# Altium PCB LiDAR.PcbDoc
Units mm, origin at the board's own origin, x right, y up, seen from the top; angles counter-clockwise.
Board outline 35 x 40 mm, 2 copper layers (Top Layer, Bottom Layer); 13 components, 9 nets, 36 pads, 9 vias.
Unrouted connection lines stored in the file: 41.
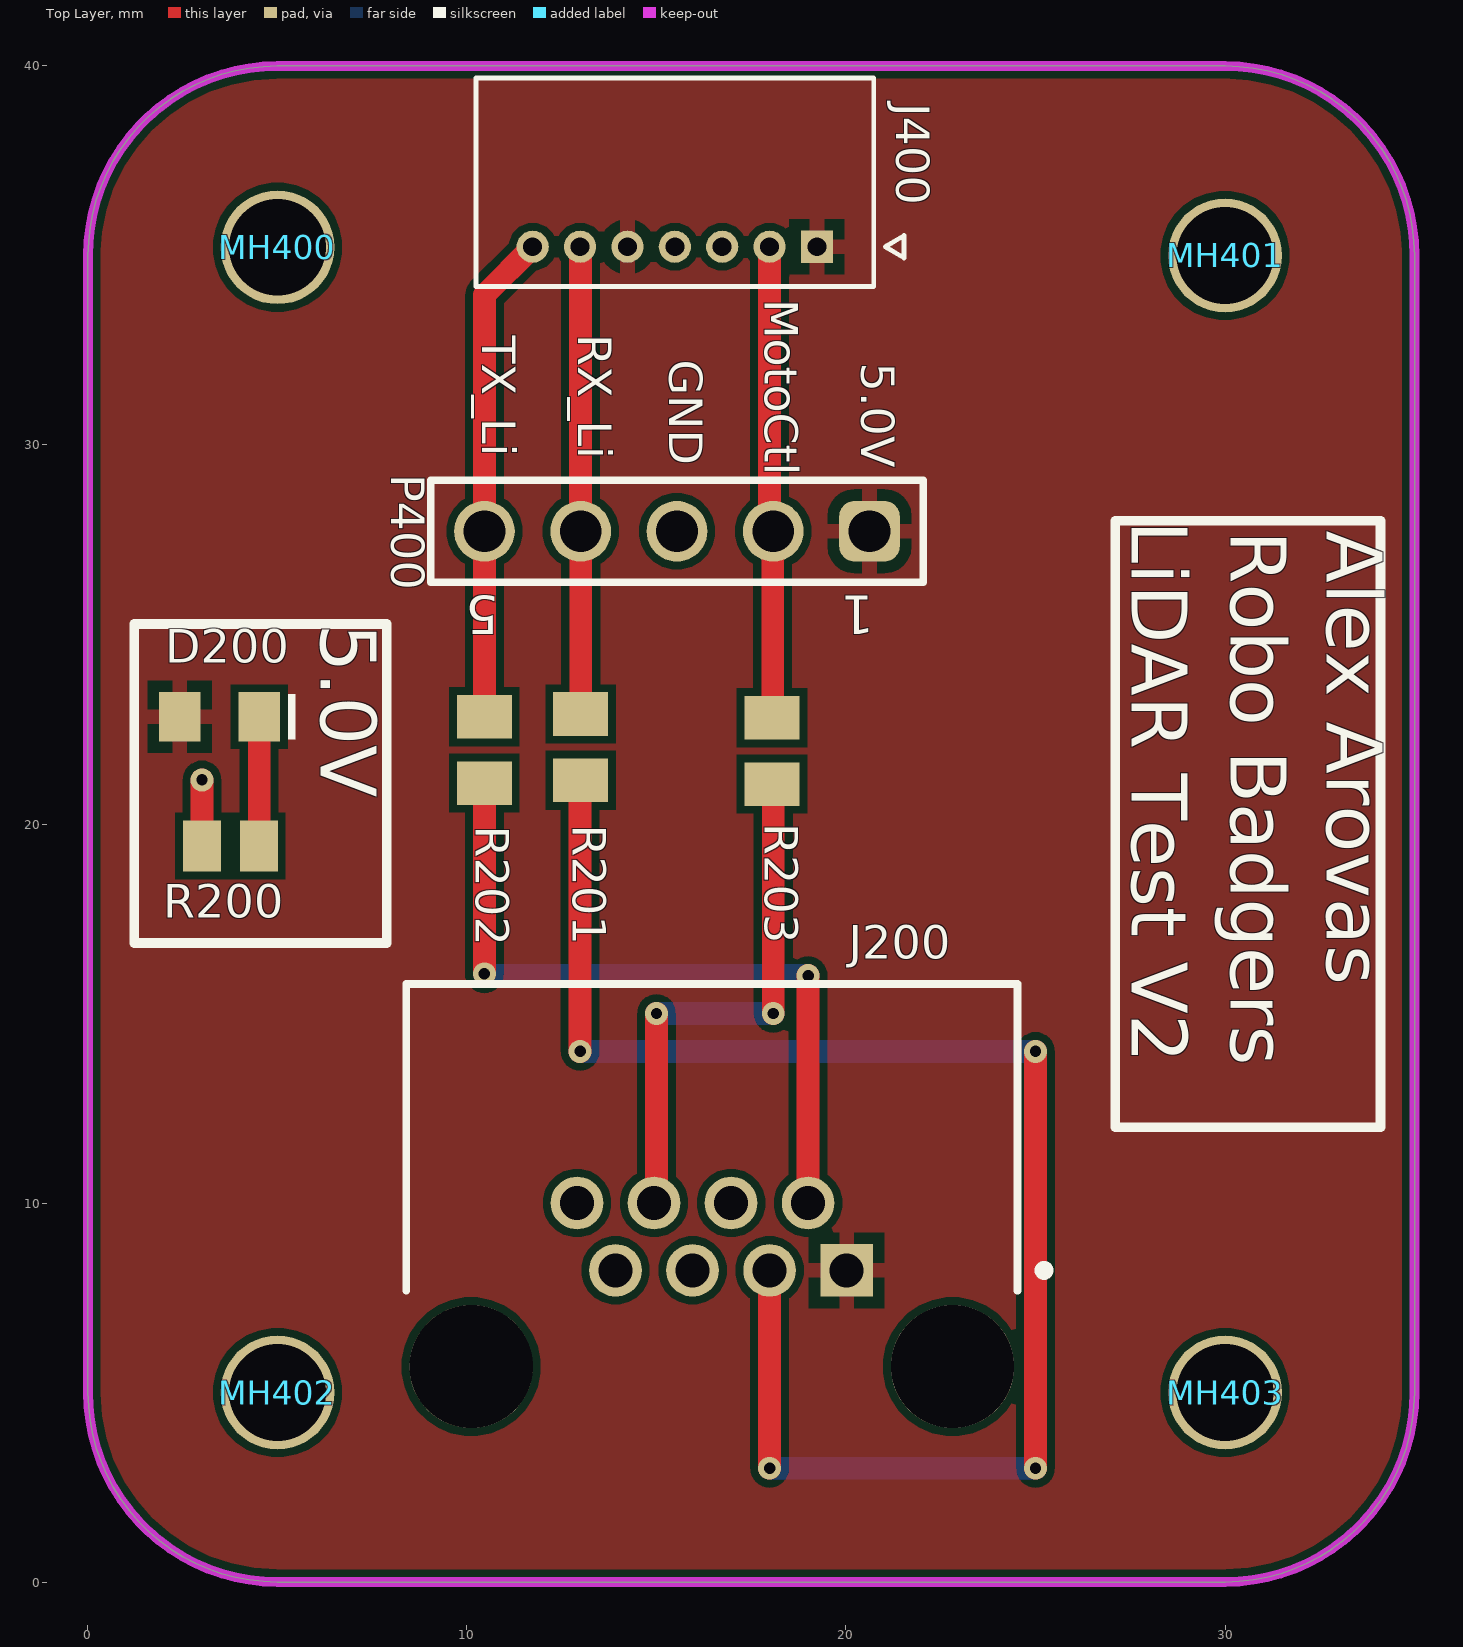
[diagram p0: Top Layer view]
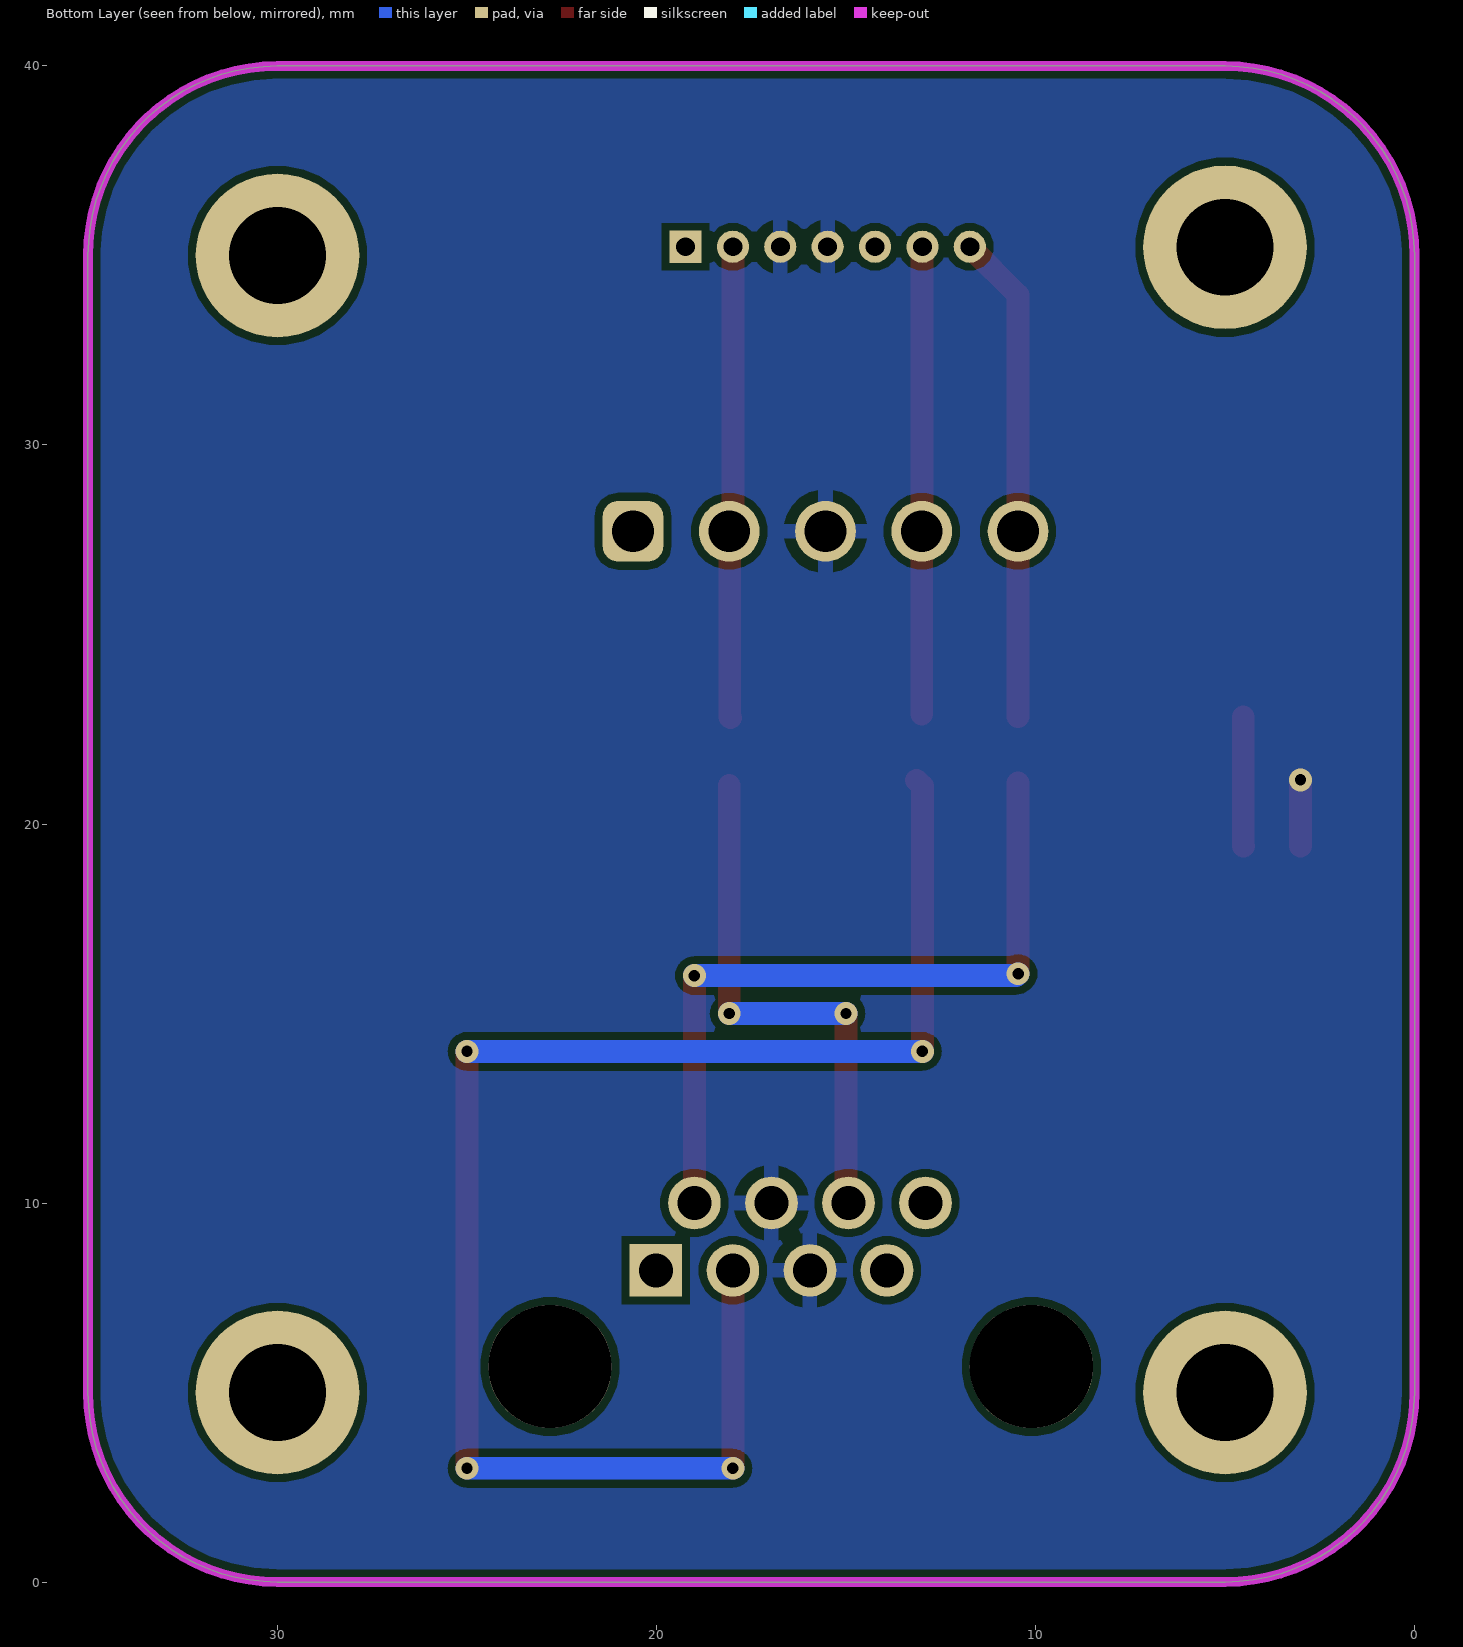
[diagram p1: Bottom Layer view, seen from below]

## Layer stack, top to bottom
Top Solder: solder mask 0.0102, Solder Resist, Dk 3.5
Top Layer: signal copper 0.0356
Dielectric1: dielectric 0.32, FR-4, Dk 4.8
Bottom Layer: signal copper 0.0356
Bottom Solder: solder mask 0.0102, Solder Resist, Dk 3.5

## Board outline
0,5 ccw(c5,5) 5,0 30,0 ccw(c30,5) 35,5 35,35 ccw(c30,35) 30,40 5,40 ccw(c5,35) 0,35

## Design rules (kind name [scope] priority, off if disabled: settings)
Clearance Polygon_Clearance [All vs InPolygon] p1: gap=0.2 ignorepadtopadclearanceinfootprint=FALSE
Clearance [All] p2: gap=0.2 ignorepadtopadclearanceinfootprint=TRUE
ComponentClearance [InComponent('U3')] p1: gap=0 collisioncheckmode=3 verticalgap=0.254 showdistances=FALSE
Height [All] p1: minheight=0 maxheight=75 prefheight=12.7
HoleSize [All] p1: absolutevalues=TRUE maxlimit=6.35 minlimit=0.3 maxpercent=80.000 minpercent=20.000
MinimumAnnularRing [All] p1: minimumring=0.15
MinimumSolderMaskSliver [All] p1: minsoldermaskwidth=0.22
NetAntennae NetAntennae_5.0V [InNet('5.0V')] p1: netantennaetolerance=0
NetAntennae NetAntennae_3.3V [InNet('3.3V')] p2: netantennaetolerance=0
PlaneClearance [All] p1: clearance=0.3
PlaneConnect [All] p1: planeconnectstyle=Relief reliefexpansion=0.3 reliefentries=4 reliefconductorwidth=0.3 reliefairgap=0.3
PolygonConnect ViaConnect [All vs IsVia] p1: connectstyle=Direct reliefconductorwidth=0.381 reliefentries=4 polygonreliefangle="90 Angle" airgapwidth=0.254
PolygonConnect [All] p2: connectstyle=Relief reliefconductorwidth=0.4 reliefentries=4 polygonreliefangle="90 Angle" airgapwidth=0.3
RoutingVias [All] p1: holewidth=0.3 width=0.6 viastyle="Through Hole" minholewidth=0.3 minwidth=0.6 maxholewidth=5 maxwidth=10
SilkToSilkClearance [All] p1: silktosilkclearance=0
SilkToSolderMaskClearance [IsPad] p1: minsilkscreentomaskgap=0 clearancetoexposedcopper=TRUE
SolderMaskExpansion [All] p1: expansion=0.102 istentingtop=FALSE
UnConnectedPin [All] p1:
Width [All] p1: maxlimit=10 minlimit=0.2 preferedwidth=0.6
21 further rules are at their usual default settings.

## Classes and differential pairs
component class 04_Mechanical: J400 MH400 MH401 MH402 MH403 P400 U1 U400

## Components (designator, comment, footprint, x,y, rotation, side; value= is the part's Value field where it differs from the comment)
D200 "150080GS75000" WL-SMCW_0805_150080xx75000 3.472,22.831 r180 top
J200 "RJHSE-5080" FP-RJHSE-5080-MFG 16.46,8.095 r0 top
J400 "53048-0710" MOLEX_530480710 19.234,35.231 r180 top
MH400 "MHOLE_2_55MM" MHOLE_2_55MM 5,35.215 r0 top
MH401 "MHOLE_2_55MM" MHOLE_2_55MM 30,35 r0 top
MH402 "MHOLE_2_55MM" MHOLE_2_55MM 5,5 r0 top locked
MH403 "MHOLE_2_55MM" MHOLE_2_55MM 30,5 r0 top
P400 "61300511121" 61300511121 15.54,27.723 r180 top
R200 "330R" RESC2013X60X40LL20T25 3.759,19.415 r180 top
R201 "0R" RESC2013X70X40NL20T20 13,22.028 r90 top
R202 "0R" RESC2013X70X40NL20T20 10.46,21.956 r90 top
R203 "0R" RESC2013X70X40NL20T20 18.049,21.928 r90 top
U400 "Bucky" WalkingBucky 114.715,31.754 r90 top

## Footprints (in the part's own frame and the unit in brackets; to place one, negate y for a bottom-side part, rotate by r counter-clockwise, add the part's x,y. Pads: shape width x height; smd on the part's side, far side on the other; paste and mask are expansions set on the pad)
61300511121 [mm] "Pin Header, pitch 2.54 mm, THT, Vertical, single row, 5p"
  rrect50% 1.6x1.6 hole 1.1: 1(-5.08,0)
  round 1.6 hole 1.1: 2(-2.54,0) 3(0,0) 4(2.54,0) 5(5.08,0)
  silkscreen extent -6.5,-1.35 6.5,1.35, body extent -6.35,-1.27 6.35,1.27, height 8.57
FP-RJHSE-5080-MFG [mm]
  rect 1.39x1.39 hole 0.89 paste-1000 mask+0: 1(3.556,0.127)
  round 1.39 hole 0.89 paste-1000 mask+0: 2(2.54,1.905) 3(1.524,0.127) 4(0.508,1.905) 5(-0.508,0.127) 6(-1.524,1.905) 7(-2.54,0.127) 8(-3.556,1.905)
  round 3.25 hole 3.25 unplated paste-1000 mask+0: ""(-6.35,-2.413) ""(6.35,-2.413)
  silkscreen extent -8.06,-0.41 8.89,7.68, body extent -8.16,-7.78 8.16,7.78, height 0.25
MHOLE_2_55MM [mm]
  round 3 / inner round 4.572 / far side round 4.318 hole 2.55: 1(0,0)
MOLEX_530480710 [mm]
  rect 0.85x0.85 / inner round 0.85 / far side rect 0.85x0.85 hole 0.5 mask+0.076: 1(0,0)
  round 0.85 hole 0.5 mask+0.076: 2(1.25,0) 3(2.5,0) 4(3.75,0) 5(5,0) 6(6.25,0) 7(7.5,0)
  silkscreen extent -2.3,-4.45 9,1.05, body extent -1.48,-4.44 9.02,1.05, height 3.5
RESC2013X60X40LL20T25 [mm] "Chip Resistor, 2-Leads, Body 2.00x1.25mm, IPC High Density"
  rect 1x1.35 smd: 1(-0.75,0) 2(0.75,0)
  body extent -1.1,-0.72 1.1,0.72, height 0.6
RESC2013X70X40NL20T20 [mm] "Chip Resistor, 2-Leads, Body 2.00x1.25mm, IPC Medium Density"
  rect 1.15x1.45 smd: 1(-0.875,0) 2(0.875,0)
  body extent -1.1,-0.72 1.1,0.72, height 0.7
WalkingBucky [mm]
  silkscreen extent -7.42,1.75 9.8,12.73
WL-SMCW_0805_150080xx75000 [mm] "SMD Mono-color Chip LED, body 2.0x1.25mm"
  rect 1.1x1.3 smd: 1(-1.05,0) 2(1.05,0)
  silkscreen extent -2,-0.6 -1.8,0.6, body extent -1,-0.63 1,0.62, height 0.7

## Part data
D200: library part CMP-1426-00007-2, Case Code (Imperial)=0805, Case Code (Metric)=2012, Color=Green, Forward Current=100mA, Forward Voltage=3.2V, Lens Color=Colorless, Manufacturer="Wurth Electronics", Max Junction Temperature (Tj)=95°C, Max Operating Temperature=85°C, Max Reverse Voltage (DC)=5V, Min Operating Temperature=-40°C, Package Quantity=1, Power Dissipation=105mW, Supplier Part Number=732-4983-1-ND, Test Current=20mA, Case/Package=0805, Category=LEDs, ComponentLink1Description=https://datasheet.ciiva.com/29563/150080gs75000-29563008.pdf?src-supplier=Digikey, ComponentLink1URL=https://datasheet.ciiva.com/29563/150080gs75000-29563008.pdf?src-supplier=Digikey, ComponentLink2Description=https://datasheet.ciiva.com/29279/759434-da-01-en-chipled-0805-w-kl-gruen-150080gs75000-29279039.pdf?src-supplier=Conrad, ComponentLink2URL=https://datasheet.ciiva.com/29279/759434-da-01-en-chipled-0805-w-kl-gruen-150080gs75000-29279039.pdf?src-supplier=Conrad, Dominant Wavelength=525nm, Height=700µm, Length=2mm, Lens Size=1.25mm, Lens Style="Clear, Rectangular", Lens Transparency=Clear, Luminous Intensity=450mcd, Manufacturer Part Number=150080GS75000, Mount="Surface Mount", Mounting Technology="Surface Mount", NexarPartId=29717780, Packaging="Tape and Reel", Peak Wavelength=515nm, Pricing="1=0.19, 50=0.176, 100=0.151, 500=0.131 (USD)", REACH SVHC=Unknown, Reach SVHC Compliant=Unknown, Reverse Voltage=5V, RoHS=Compliant, RoHS Compliant=Yes, Series=WL-SMCW, Stock=29733, Supplier=Digikey, Viewing Angle=140°, Wavelength=520nm, Width=1.25mm
J200: library part CMP-02366-000003-1, "CONN MOD JACK 8P8C R/A UNSHLD", Contact Resistance=20mR, Current Rating=1.5A, Manufacturer=Amphenol, Max Voltage Rating (AC)=125V, Package=CONN_MOD_JACK, Supplier Part Number=RJHSE-5080-ND, Temperature="-55°C to +85°C", Temperature Range High=+85°C, Temperature Range Low=-55°C, Automotive=No, Category=Conn, ComponentLink1Description=https://datasheet.ciiva.com/7629/1682821-7629402.pdf?src-supplier=Element14, ComponentLink1URL=https://datasheet.ciiva.com/7629/1682821-7629402.pdf?src-supplier=Element14, ComponentLink2Description=Datasheet, ComponentLink2URL=https://cdn.amphenol-icc.com/media/wysiwyg/files/documentation/datasheet/inputoutput/io-modjack-rjhse.pdf, ComponentLink3Description=https://datasheet.ciiva.com/1432/1693748-1432448.pdf?src-supplier=Element14, ComponentLink3URL=https://datasheet.ciiva.com/1432/1693748-1432448.pdf?src-supplier=Element14, Conn Gender=Female, Conn Orientation="Right Angle", Connector Type=RJ45, Contact Material=Gold,Nickel, Contact Plating=Gold, Depth=14.99mm, Device Class L1=Connectors, Device Class L2="Modular / Ethernet Connectors", Device Class L3=unset, Digikey Description="CONN MOD JACK 8P8C R/A UNSHLD", Footprint Url=https://cdn.amphenol-icc.com/media/wysiwyg/files/drawing/rjhse5080.pdf?__cf_chl_jschl_tk__=e349db0bbbb6188a39347cd5e541b92fa02c9719-1587748343-0-AW7tChdeHzRPLX9gSWj7WrKaXQoY9BsmT9Ek0h-T62M9y3Rs9iypFcOtkzb-6sGYQEjFE-jcoNciDETCOZrh1rYyOesac5SvYLoLwHIsHvF4AKBlx-MXmfZUVk9OTTJLqyQq2qMm0PFRLJpNcK0nrKResqOniRSYixG2sPTmOPraH-ULJFBDL602CHqcI9KKBgTq90Jh1OL2Td4moJ99rFsJRJ1Tk_uoxGe8ublcP_ARu-uLpWcQrBcwOcHDTAwL29DAwVaqcH7ta8Ks7WMlHmVl_pILeEDwT0bE9vu5Pa5S3PtNRF1leuFkgi_FMbUxTDulc5xzbXSfng8srUIV1lWXny5nx1fZJEUa_w97yKjffzBMxiWLWVN-V7-uqAaPbyv_m-wRyw5O25OZNyJOeGU, Gender=Female, Height=0.535inch, Is Female=yes, Lead Free=Yes, Length=15.75mm, Manufacturer Part Number=RJHSE-5080, Max Current Rating=1.5A, Mounting Technology="Through Hole,Panel", Mouser Description="Modular Connectors / Ethernet Connectors R/A RJ45 NONSHIELDED 8 CONT NO LEDS", Number of Contacts=8, Number of Ports=1, Number of Positions=8, Number of Positions Loaded=8, Octopart=https://octopart.com/rjhse-5080-amphenol-45060, Orientation="Right Angle", Packaging=Rail/Tube, Pitch=1.02mm, Pricing="1=1.03, 10=0.867, 25=0.832, 50=0.8142, 100=0.7788, 250=0.708, 500=0.6372, 1000=0.56641, 2500=0.51331 (USD)", Radiation Hardening=No, Reach SVHC Compliant=Unknown, RoHS=TRUE, RoHS Compliant=Yes, Stock=72112, Supplier=Digikey, Termination=Solder, Voltage Rating=125V, Voltage Rating (DC)=125V
J400: "7-Pin 1.25mm Molex Connector", Package=None, Availability=Unavailable, MP=530480710, Price=None
MH400 MH401 MH402 MH403: "Mounting Holde", Manufacturer Part Number="UW MTHOLE"
P400: library part CMP-1502-01068-2, Color=Black, Contact Resistance=20mΩ, Current Rating=3A, Max Operating Temperature=105°C, Min Operating Temperature=-40°C, Operating Supply Voltage=250V, Connector Type="Male Pin", Contact Material=Copper, Contact Mating Length=5.9944mm, Contact Plating=Gold, Gender=Male, Height=8.89mm, Lead Free="Lead Free", Lead Pitch=2.54mm, Mount="Through Hole", NexarPartId=32855526, Number of Contacts=5, Number of Pins=5, Number of Positions=5, Number of Rows=1, Orientation=Vertical, Packaging=Bulk, Pitch=2.54mm, REACH SVHC=Unknown, RoHS=Compliant, Termination=Solder, Voltage Rating=250V
R200: library part CMP-2001-00628-1, Case/Package=0805, Manufacturer=Panasonic, Manufacturer Part Number=ERA-6AEB331V, Max Operating Temperature=155°C, Min Operating Temperature=-55°C, Package Height=0.5mm, Package Length=2mm, Package Style=SMTMeter, Package Width=1.25mm, Part Number=ERA6AEB331V, Power=125mW, Rated Temperature=85°C, Resistor Type="FIXED RESISTOR", Supplier Part Number=P330DACT-ND, Temperature Coefficient=25ppm/°C, Tolerance=0.1%, Working Voltage=100V, Category="Chip SMD Resistors", ComponentLink1Description=https://datasheet.ciiva.com:443/pdfs/VipMasterIC/IC/PANA/PANA-S-A0009459258/PANA-S-A0009459258-1.pdf?src-supplier=IHS+Markit, ComponentLink1URL=https://datasheet.ciiva.com:443/pdfs/VipMasterIC/IC/PANA/PANA-S-A0009459258/PANA-S-A0009459258-1.pdf?src-supplier=IHS+Markit, ComponentLink2Description=https://datasheet.ciiva.com/11808/0900766b80eb1d8c-11808093.pdf?src-supplier=Rs, ComponentLink2URL=https://datasheet.ciiva.com/11808/0900766b80eb1d8c-11808093.pdf?src-supplier=Rs, ComponentLink3Description=https://datasheet.ciiva.com/29184/452857-da-01-en-widerstand-0805-era-29184079.pdf?src-supplier=Conrad, ComponentLink3URL=https://datasheet.ciiva.com/29184/452857-da-01-en-widerstand-0805-era-29184079.pdf?src-supplier=Conrad, ComponentLink4Description=https://datasheet.ciiva.com/30237/54aoa0000ce26-30237450.pdf?src-supplier=Onlinecomponents.com, ComponentLink4URL=https://datasheet.ciiva.com/30237/54aoa0000ce26-30237450.pdf?src-supplier=Onlinecomponents.com, ComponentLink5Description=https://datasheet.ciiva.com/16777/70068849-16777611.pdf?src-supplier=Allied+Electronics, ComponentLink5URL=https://datasheet.ciiva.com/16777/70068849-16777611.pdf?src-supplier=Allied+Electronics, ComponentLink6Description=https://datasheet.ciiva.com/9182/aoa0000ce26-9182968.pdf?src-supplier=Avnet, ComponentLink6URL=https://datasheet.ciiva.com/9182/aoa0000ce26-9182968.pdf?src-supplier=Avnet, ComponentLink7Description=https://datasheet.ciiva.com/48536/era-eng-tds-48536857.pdf?src-supplier=Distrelec, ComponentLink7URL=https://datasheet.ciiva.com/48536/era-eng-tds-48536857.pdf?src-supplier=Distrelec, ComponentLink8Description=https://datasheet.ciiva.com/22744/1776116-22744153.pdf?src-supplier=Element14, ComponentLink8URL=https://datasheet.ciiva.com/22744/1776116-22744153.pdf?src-supplier=Element14, ComponentLink9Description=https://datasheet.ciiva.com/46436/485442-46436606.pdf?src-supplier=Element14, ComponentLink9URL=https://datasheet.ciiva.com/46436/485442-46436606.pdf?src-supplier=Element14, ComponentLink10Description=https://datasheet.ciiva.com/6138/485442-6138585.pdf?src-supplier=Farnell, ComponentLink10URL=https://datasheet.ciiva.com/6138/485442-6138585.pdf?src-supplier=Farnell, ComponentLink11Description=https://datasheet.ciiva.com/6138/485442-6138589.pdf?src-supplier=Farnell, ComponentLink11URL=https://datasheet.ciiva.com/6138/485442-6138589.pdf?src-supplier=Farnell, ComponentLink12Description=https://datasheet.ciiva.com/22759/485442-22759176.pdf?src-supplier=Farnell, ComponentLink12URL=https://datasheet.ciiva.com/22759/485442-22759176.pdf?src-supplier=Farnell, ComponentLink13Description=https://datasheet.ciiva.com/43457/485442-43457816.pdf?src-supplier=Farnell, ComponentLink13URL=https://datasheet.ciiva.com/43457/485442-43457816.pdf?src-supplier=Farnell, ComponentLink14Description=https://datasheet.ciiva.com/24164/aoa0000ce26-197354-24164407.pdf?src-supplier=Mouser, ComponentLink14URL=https://datasheet.ciiva.com/24164/aoa0000ce26-197354-24164407.pdf?src-supplier=Mouser, Construction=Rectangular, JESD-609 Code=e3, Mounting Technology="Surface Mount", Packaging="Tape and Reel", Pins=2, Pricing="1=0.13, 10=0.095, 50=0.0748, 100=0.067, 500=0.05106, 1000=0.04511 (USD)", Reach SVHC Compliant=Yes, Reference Standard=AEC-Q200, RoHS=Yes, RoHS Compliant=Yes, Stock=18932, Supplier=Digikey, Technology="THIN FILM", Terminal Finish=Nickel, Termination=Wraparound
R201 R202 R203: library part CMP-1665-00002-5, "Chip Resistor, 0 Ohm, +/- 1%, 0.125 W, -55 to 155 degC, 0805 (2012 Metric), RoHS, Tape and Reel", Case Code (Imperial)=0805, Case Code (Metric)=2012, Manufacturer=Panasonic, Manufacturer Part Number=ERJ-6GEY0R00V, Max Operating Temperature="155 degC", Min Operating Temperature="-55 degC", Package Height=0.6mm, Package Length=2mm, Package Quantity=5000, Package Shape=Rectangular, Package Style=SMTMeter, Package Width=1.25mm, Power=125mW, Rated Temperature=70°C, Resistance="0 Ohm", Resistor Type="FIXED RESISTOR", Supplier Part Number=P0.0ACT-ND, Tolerance=5%, Case/Package=0805, Category="Chip SMD Resistors", ComponentLink1Description="Manufacturer URL", ComponentLink1URL=http://www.panasonic.com/, ComponentLink2Description=Datasheet, ComponentLink2URL=http://industrial.panasonic.com/cdbs/www-data/pdf/RDA0000/AOA0000C84.pdf, ComponentLink3Description=https://datasheet.ciiva.com:443/pdfs/VipMasterIC/IC/PANA/PANA-S-A0009459603/PANA-S-A0009459603-1.pdf?src-supplier=IHS+Markit, ComponentLink3URL=https://datasheet.ciiva.com:443/pdfs/VipMasterIC/IC/PANA/PANA-S-A0009459603/PANA-S-A0009459603-1.pdf?src-supplier=IHS+Markit, ComponentLink4Description=https://datasheet.ciiva.com/36526/1989607-36526237.pdf?src-supplier=Jameco, ComponentLink4URL=https://datasheet.ciiva.com/36526/1989607-36526237.pdf?src-supplier=Jameco, ComponentLink5Description=https://datasheet.ciiva.com/11821/0900766b80f806dd-11821735.pdf?src-supplier=Rs, ComponentLink5URL=https://datasheet.ciiva.com/11821/0900766b80f806dd-11821735.pdf?src-supplier=Rs, ComponentLink6Description=https://datasheet.ciiva.com/43460/1678796-43460073.pdf?src-supplier=Farnell, ComponentLink6URL=https://datasheet.ciiva.com/43460/1678796-43460073.pdf?src-supplier=Farnell, ComponentLink7Description=https://datasheet.ciiva.com/46377/1678796-46377866.pdf?src-supplier=Element14, ComponentLink7URL=https://datasheet.ciiva.com/46377/1678796-46377866.pdf?src-supplier=Element14, ComponentLink8Description=https://datasheet.ciiva.com/28695/1678796-28695877.pdf?src-supplier=Element14, ComponentLink8URL=https://datasheet.ciiva.com/28695/1678796-28695877.pdf?src-supplier=Element14, ComponentLink9Description=https://datasheet.ciiva.com/9117/aoa0000ce1-9117354.pdf?src-supplier=Avnet, ComponentLink9URL=https://datasheet.ciiva.com/9117/aoa0000ce1-9117354.pdf?src-supplier=Avnet, Construction=Rectangular, DatasheetVersion=03/2015, Height="0.6 mm", JESD-609 Code=e3, Length="2 mm", Mounting Technology="Surface Mount", PackageDescription="2-Pin Surface Mount Device, Body 2 x 1.25 mm", Packaging="Tape and Reel", PartNumber=ERJ-6GEY0R00V, Pins=2, Pricing="1=0.1, 10=0.057, 25=0.0432, 50=0.033, 100=0.0231, 250=0.01856, 500=0.01484, 1000=0.01092 (USD)", Radiation Hardening=No, REACH SVHC="No SVHC", Reach SVHC Compliant=Yes, Reference Standard=AEC-Q200, RoHS=Yes, RoHS Compliant=Yes, RoHSCompliant=True, Stock=179566, Supplier=Digikey, Technology="METAL GLAZE/THICK FILM", Terminal Finish=Nickel, Termination=Wraparound, Width="1.25 mm"
U400: "Bucky Badger Image", Manufacturer Part Number="UW Bucky"

## Via types
v1: diameter 0.6, hole 0.3, Top Layer to Bottom Layer, 9 vias

## Nets (pads, with @x,y where several pads share a name; then routed paths per layer and width w, separated by ;. In a path a pad name is that pad's centre, name@x,y a point inside that pad or via, vN(x,y) a via of type N, cw(c..) or ccw(c..) an arc to the next point about the centre after c; other vN are vias at no path point)
5.0V: D200.2 J200.1 J400.1 J400.5 P400.1
GND: J200.4 J200.5 J400.3 J400.4 P400.3 R200.2 | length 1.7
  Top Layer w0.6: R200.2 v1(3.009,21.163)
MOTOCTL_LiDAR: J400.2 P400.2 R203.2 | length 12.5
  Top Layer w0.6: J400.2 17.984,27.819 P400.2 18.064,27.707 18.064,22.819 R203.2
MOTOCTL_MCU: J200.6 R203.1 | length 14.1
  Top Layer w0.6: J200.6 15,10.064 v1(15,15) ; v1(18.08,15) R203.1@18.08,21.022
  Bottom Layer w0.6: v1(15,15) v1(18.08,15)
PWR_ON: D200.1 R200.1 | length 3.4
  Top Layer w0.6: R200.1 4.515,19.422 4.515,22.824 D200.1
RX_LiDAR: J400.6 P400.4 R201.2 | length 12.3
  Top Layer w0.6: J400.6 12.992,35.223 12.992,27.731 P400.4 R201.2
RX_MCU: J200.2 R202.1 | length 19.6
  Top Layer w0.6: v1(10.46,16.049) R202.1 ; J200.2 v1(19,16)
  Bottom Layer w0.6: v1(10.46,16.049) 10.509,16 v1(19,16)
TX_LiDAR: J400.7 P400.5 R202.2 | length 12.9
  Top Layer w0.6: R202.2 P400.5 10.46,33.957 J400.7
TX_MCU: J200.3 R201.1 | length 42.5
  Top Layer w0.6: v1(12.984,14) 12.984,21 R201.1@13.137,21.153 ; v1(17.984,3) J200.3 ; v1(25,3) v1(25,14)
  Bottom Layer w0.6: v1(12.984,14) v1(25,14) ; v1(17.984,3) v1(25,3)
pads on no net: J200. J200.7 J200.8 MH400.1 MH401.1 MH402.1 MH403.1

## Polygon pours and split planes (outlines as drawn)
GND on Bottom Layer "B_GND" (solid, remove dead copper, pour order 1): 0,40 35,40 35,0 0,0
5.0V on Top Layer "T_5.0V" (solid, remove dead copper, pour order 0): 0,40 35,40 35,0 0,0

## Keep-outs
Keep-Out Layer:
  lines w0.254: 0,34.931 0,5 ccw(c5,5) 5,0 30,0 ccw(c30,5) 35,5 35,35 ccw(c30,35) 30,40 5,40 ccw(c5,35) 0,35

## Silkscreen, mask and mechanical layers (free items; w line width, h text height)
Top Overlay:
  lines w0.254: 1.222,16.859 1.222,25.276 7.883,25.276 7.883,16.859 1.222,16.859 ; 27.102,12 27.102,28 34.102,28 34.102,12 27.102,12
  text "MotoCtl" at 17.57,33.846 h1.52 r270
  text "RX_Li" at 12.647,32.916 h1.52 r270
  text "TX_Li" at 10.107,32.877 h1.52 r270
  text "GND" at 15.052,32.249 h1.52 r270
  text "5.0V" at 20.109,32.174 h1.52 r270
  text "LiDAR Test V2" at 27.054,28 h2.52 r270
  text "Alex Arovas / Robo Badgers" at 29.668,27.737 h2.52 r270
  text "5.0V" at 5.651,25.277 h2.52 r270
Mechanical 2:
  lines w0.254: 0,34.931 0,5 ccw(c5,5) 5,0 ; 0,35 cw(c5,35) 5,40 30,40 cw(c30,35) 35,35 35,5 cw(c30,5) 30,0 5,0 ; 5,0 5,0

## Dimensions
5,0 to 30,40 on Mechanical 1
0,34.931 to 35,5 on Mechanical 1

## Text inside footprints (layer, text, board x,y; h text height)
J400: Mechanical 13 "PTH D0.5 +/- 0.05" at 21.734,44.731 h0.5 r180
P400: Top Overlay "5" at 10.84,26.023 h1.02 r180; Top Overlay "1" at 20.74,26.023 h1.02 r180
U400: Top Overlay "ECE 453" at 115.223,28.96 h1.02 r90